# EAGLE board Ad8232_placa_V4_reduzida (EAGLE 9.6.2)
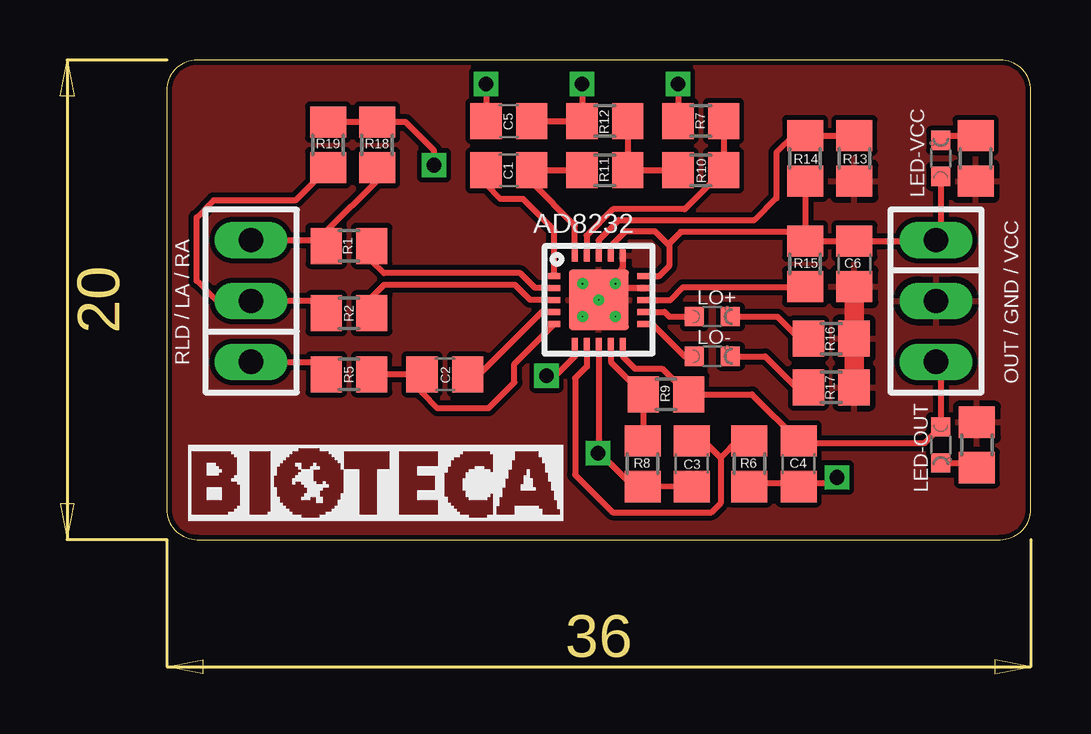
[diagram p0: board, top side]
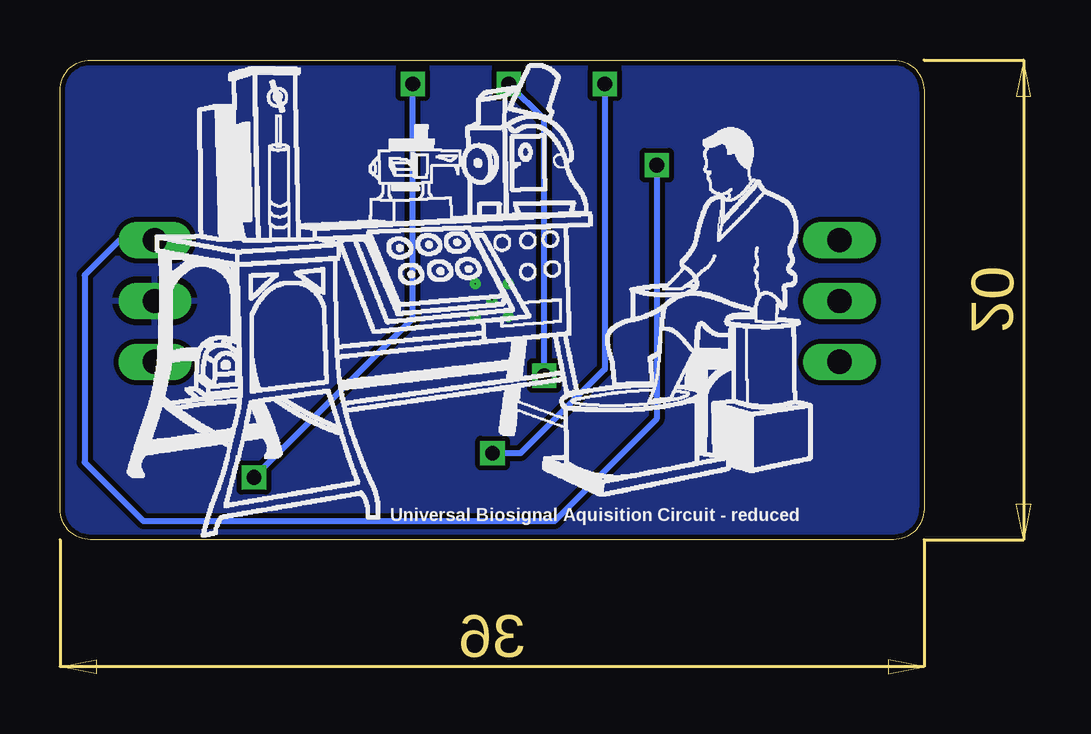
[diagram p1: board, bottom side, seen from below]

Size 36 x 20 mm. Coordinates in mm from the lower left corner, seen from the top.
Outline: 0,18.73 0,1.27 arc90 1.27,0 34.73,0 arc90 36,1.27 36,18.73 arc90 34.73,20 1.27,20 arc90 0,18.73
Copper layers (1*16): Top 0.035mm / dielectric 1.5mm / Bottom 0.035mm
Design rules "default *": minimum track width 10mil, minimum drill 24mil, track to track 8mil, track to pad 8mil, pad to pad 8mil, via to via 8mil, smd to smd 8mil, copper to edge 8mil, drill to drill 8mil, minimum pad ring 10mil, minimum via ring 8mil, stop-mask expansion 4mil, vias tented up to drill 0mil, thermal gap 10mil

## Footprints (pad centres in the part's own frame; a part is rotated, then mirrored left to right if it is on the bottom)
C0805 = smd 1.3 x 1.5: 1 -0.95,0; 2 0.95,0
SIP-100-03-40Y = drill 1.016 long: 1 -2.54,0; 2 0,0; 3 2.54,0
CHIPLED_0603 = smd 0.8 x 0.8: A 0,-0.75; C 0,0.75
R0805 = smd 1.3 x 1.5: 1 -0.95,0; 2 0.95,0
LFCSP_20 = smd 0.5 x 0.25: 1 -1.85,1; 2 -1.85,0.5; 3 -1.85,0; 4 -1.85,-0.5; 5 -1.85,-1; 11 1.85,-1; 12 1.85,-0.5; 13 1.85,0; 14 1.85,0.5; 15 1.85,1 | smd 0.25 x 0.5: 6 -1,-1.85; 7 -0.5,-1.85; 8 0,-1.85; 9 0.5,-1.85; 10 1,-1.85; 16 1,1.85; 17 0.5,1.85; 18 0,1.85; 19 -0.5,1.85; 20 -1,1.85 | smd 2.5 x 2.5: PAD 0,0

## Placement (x,y rotation side)
C1  [C0805]  14.25,15.4 0 top
C2  [C0805]  11.59,6.89 0 top
C3  [C0805]  21.87,3.16 90 top
C4  [C0805]  26.32,3.16 270 top
C5  [C0805]  14.25,17.45 0 top
C6  [C0805]  28.65,11.5 270 top
ELETRODOS  F-1X03-SIP-100-40Y  [SIP-100-03-40Y]  3.51,9.95 90 top
LED-OUT  [CHIPLED_0603]  32.25,3.95 180 top
LED-VCC  [CHIPLED_0603]  32.25,15.9 0 top
LO+  [CHIPLED_0603]  22.73,9.3 270 top
LO-  [CHIPLED_0603]  22.73,7.65 270 top
OUT/GND/VCC  F-1X03-SIP-100-40Y  [SIP-100-03-40Y]  32.05,9.95 270 top
R1  [R0805]  7.59,12.25 0 top
R2  [R0805]  7.59,9.44 0 top
R3  [R0805]  33.75,3.95 270 top
R4  [R0805]  33.7,15.9 90 top
R5  [R0805]  7.59,6.89 180 top
R6  [R0805]  24.27,3.16 270 top
R7  [R0805]  22.25,17.45 0 top
R8  [R0805]  19.82,3.16 90 top
R9  [R0805]  20.8,6.05 0 top
R10  [R0805]  22.25,15.4 0 top
R11  [R0805]  18.25,15.4 180 top
R12  [R0805]  18.25,17.45 0 top
R13  [R0805]  26.6,15.9 270 top
R14  [R0805]  28.65,15.9 90 top
R15  [R0805]  26.6,11.5 270 top
R16  [R0805]  27.69,8.38 180 top
R17  [R0805]  27.69,6.35 180 top
R18  [R0805]  8.76,16.46 90 top
R19  [R0805]  6.72,16.46 90 top
U$1  AD8232  [LFCSP_20]  18,10 0 top

## Library data of the parts
C1-C6 R1-R19 = rcl
ELETRODOS OUT/GND/VCC = con-headers-jp
LED-OUT LED-VCC LO+ LO- = led
U$1 = AD8232; AVAILABILITY: Not in stock; DESCRIPTION: AD8232 Sensor Signal Conditioner Interface Evaluation Board; MF: Analog Devices; MP: AD8232; PACKAGE: LFCSP-20 Analog Devices; PRICE: None

## Nets
GND: C6.2 OUT/GND/VCC.2 R3.1 R4.1 R14.1 R16.1 R17.1 U$1.14 U$1.16 U$1.PAD
HPOUT: R7.2 R10.2 U$1.19
LO+: LO+.A U$1.12
LO-: LO-.A U$1.11
N$1: C1.1 U$1.1
N$2: C1.2 R11.2 U$1.20
N$3: R1.2 U$1.2
N$4: R2.2 U$1.3
N$5: ELETRODOS.3 R1.1 R18.1
N$6: ELETRODOS.2 R2.1 R19.1
N$7: C2.2 U$1.4
N$8: C2.1 R5.1 U$1.5
N$9: C3.2 R6.1 U$1.7
N$10: R13.1 R14.2 U$1.18
N$11: R8.2 R9.1 U$1.9
N$12: LED-OUT.C R3.2
N$13: R10.1 R11.1 R12.2
N$14: C4.2 R6.2 R7.1
N$15: LED-VCC.C R4.2
N$16: R15.2 U$1.13
N$17: LO+.C R16.2
N$18: LO-.C R17.2
OUT: C4.1 LED-OUT.A OUT/GND/VCC.3 R9.2 U$1.10
REFOUT: C3.1 C5.1 R8.1 U$1.8
RLD: ELETRODOS.1 R5.2
SW: C5.2 R12.1 U$1.6
VCC: C6.1 LED-VCC.A OUT/GND/VCC.1 R13.2 R15.1 R18.2 R19.2 U$1.15 U$1.17

## Tracks (layer width: path | path; a pad name or v marks a point on that pad's centre or on a via)
GND  (via drill 0.05 pad 0.05)
  Top 0.254: U$1.14 18.5,10.5 U$1.PAD 18.38,10.38 19,11.38 U$1.16 | 28.65,8.4 R16.1
  Top 0.813: C6.2 28.65,8.4 | R16.1 R17.1
  other vias: 18.69,9.3 17.32,9.3 17.32,10.67 18.69,10.67 18,10
  pour Top: -0.3,20.35 36.35,20.35 36.35,-0.48 -0.3,-0.48
  pour Bottom: -1.52,22.65 -1.52,-1.63 37.9,-1.63 37.9,22.65
HPOUT
  Top 0.254: R7.2 R10.2 21.58,13.78 18.59,13.78 17.5,12.69 U$1.19
LO+
  Top 0.254: U$1.12 20.74,9.5 20.94,9.3 LO+.A
LO-
  Top 0.254: U$1.11 20.22,9 21.58,7.64 LO-.A
N$1
  Top 0.254: U$1.1 16.15,12.9 14.85,14.2 13.9,14.2 13.3,14.8 C1.1
N$2
  Top 0.254: R11.2 C1.2 15.2,14.9 17,13.1 U$1.20
N$3
  Top 0.254: U$1.2 15.35,10.5 14.73,11.11 9.05,11.11 8.54,11.62 R1.2
N$4
  Top 0.254: U$1.3 15.13,10 14.52,10.62 9.04,10.62 8.54,10.12 R2.2
N$5
  Top 0.254: ELETRODOS.3 3.49,12.46 6.2,12.46 6.42,12.25 R1.1 6.64,12.86 8.76,14.98 R18.1
N$6
  Top 0.254: R2.1 6.13,9.95 ELETRODOS.2 2.09,9.95 1.25,10.79 1.25,13.44 1.95,14.14 5.35,14.14 R19.1 6.78,15.54
N$7
  Top 0.254: C2.2 13.02,6.89 15.62,9.5 U$1.4
N$8
  Top 0.254: R5.1 C2.1 10.64,6.13 11.28,5.49 13.41,5.49 14.48,6.55 14.48,7.33 U$1.5
N$9
  Top 0.254: C3.2 22.37,4.11 23.07,3.41 | 23.07,3.41 23.07,1.51 22.7,1.14 18.58,1.14 17.02,2.7 17.02,6.73 17.5,7.21 U$1.7 | R6.1 23.77,4.11 23.07,3.41
N$10
  Top 0.254: R14.2 R13.1 26.1,16.85 25.4,16.15 25.4,14.23 24.49,13.32 18.83,13.32 18,12.49 U$1.18
N$11
  Top 0.254: 19.7,4.11 R8.2 19.85,4.14 R9.1 18.5,7.41 U$1.9
N$12
  Top 0.254: LED-OUT.C 33.55,3.2 R3.2
N$13
  Top 0.254: R12.2 R11.1 R10.1
N$14  (via drill 0.61)
  Top 0.254: R6.2 24.4,2.34 26.2,2.34 C4.2 26.45,2.34 27.67,2.34 v27.92,2.59 | v21.3,19 R7.1
  Bottom 0.254: v27.92,2.59 21.3,9.21 v21.3,19
N$15
  Top 0.254: LED-VCC.C 32.45,16.85 R4.2
N$16
  Top 0.254: U$1.13 20.99,10 21.51,10.51 26.77,10.51 26.81,10.55 R15.2
N$17
  Top 0.254: LO+.C 25.44,9.3 26.36,8.38 R16.2
N$18
  Top 0.254: LO-.C 24.93,7.64 26.23,6.35 R17.2
OUT
  Top 0.254: OUT/GND/VCC.3 32.25,7.28 LED-OUT.A 31.56,4.01 26.42,4.01 C4.1 24.38,6.05 R9.2 21.72,6.05 20.64,7.13 19.51,7.13 19,7.64 U$1.10
REFOUT  (via drill 0.61)
  Top 0.254: C3.1 19.86,2.19 R8.1 19.44,2.21 18.04,3.61 v17.97,3.61 18,3.64 U$1.8 | v13.3,19 C5.1
  Bottom 0.254: v17.97,3.61 16.8,3.61 13.3,7.11 v13.3,19
RLD
  Top 0.254: ELETRODOS.1 6.12,7.41 R5.2
SW  (via drill 0.61)
  Top 0.254: C5.2 R12.1 v17.3,19 | U$1.6 17,7.64 16.2,6.84 v15.82,6.84
  Bottom 0.254: v15.82,6.84 15.82,17.52 v17.3,19
VCC  (via drill 0.61 pad 0.05)
  Top 0.254: R13.2 R15.1 | R15.1 C6.1 32.01,12.45 OUT/GND/VCC.1 32.25,12.69 LED-VCC.A | U$1.17 18.5,12.25 19.1,12.85 20.35,12.85 20.91,12.29 20.93,12.31 | U$1.15 20.52,11 20.93,11.4 20.93,12.31 | R15.1 26.22,12.83 21.41,12.83 20.93,12.35 20.93,12.31 | v11.13,15.62 11.13,16.23 9.95,17.41 R18.2 R19.2
  Bottom 0.254: OUT/GND/VCC.1 33.51,12.49 34.97,11.03 34.97,3.22 32.51,0.76 15.4,0.76 11.14,5.02 v11.14,15.61 v11.13,15.62

## Text on the board
bPlace: Universal Biosignal Aquisition Circuit - reduced
tNames: RLD / LA / RA | OUT / GND / VCC